# Altium PCB Connector_26P.PcbDoc
Units mm, origin at the board's own origin, x right, y up, seen from the top; angles counter-clockwise.
Board outline 35.43 x 48.13 mm, 2 copper layers (Top Layer, Bottom Layer); 3 components, 26 nets, 84 pads, 0 vias.
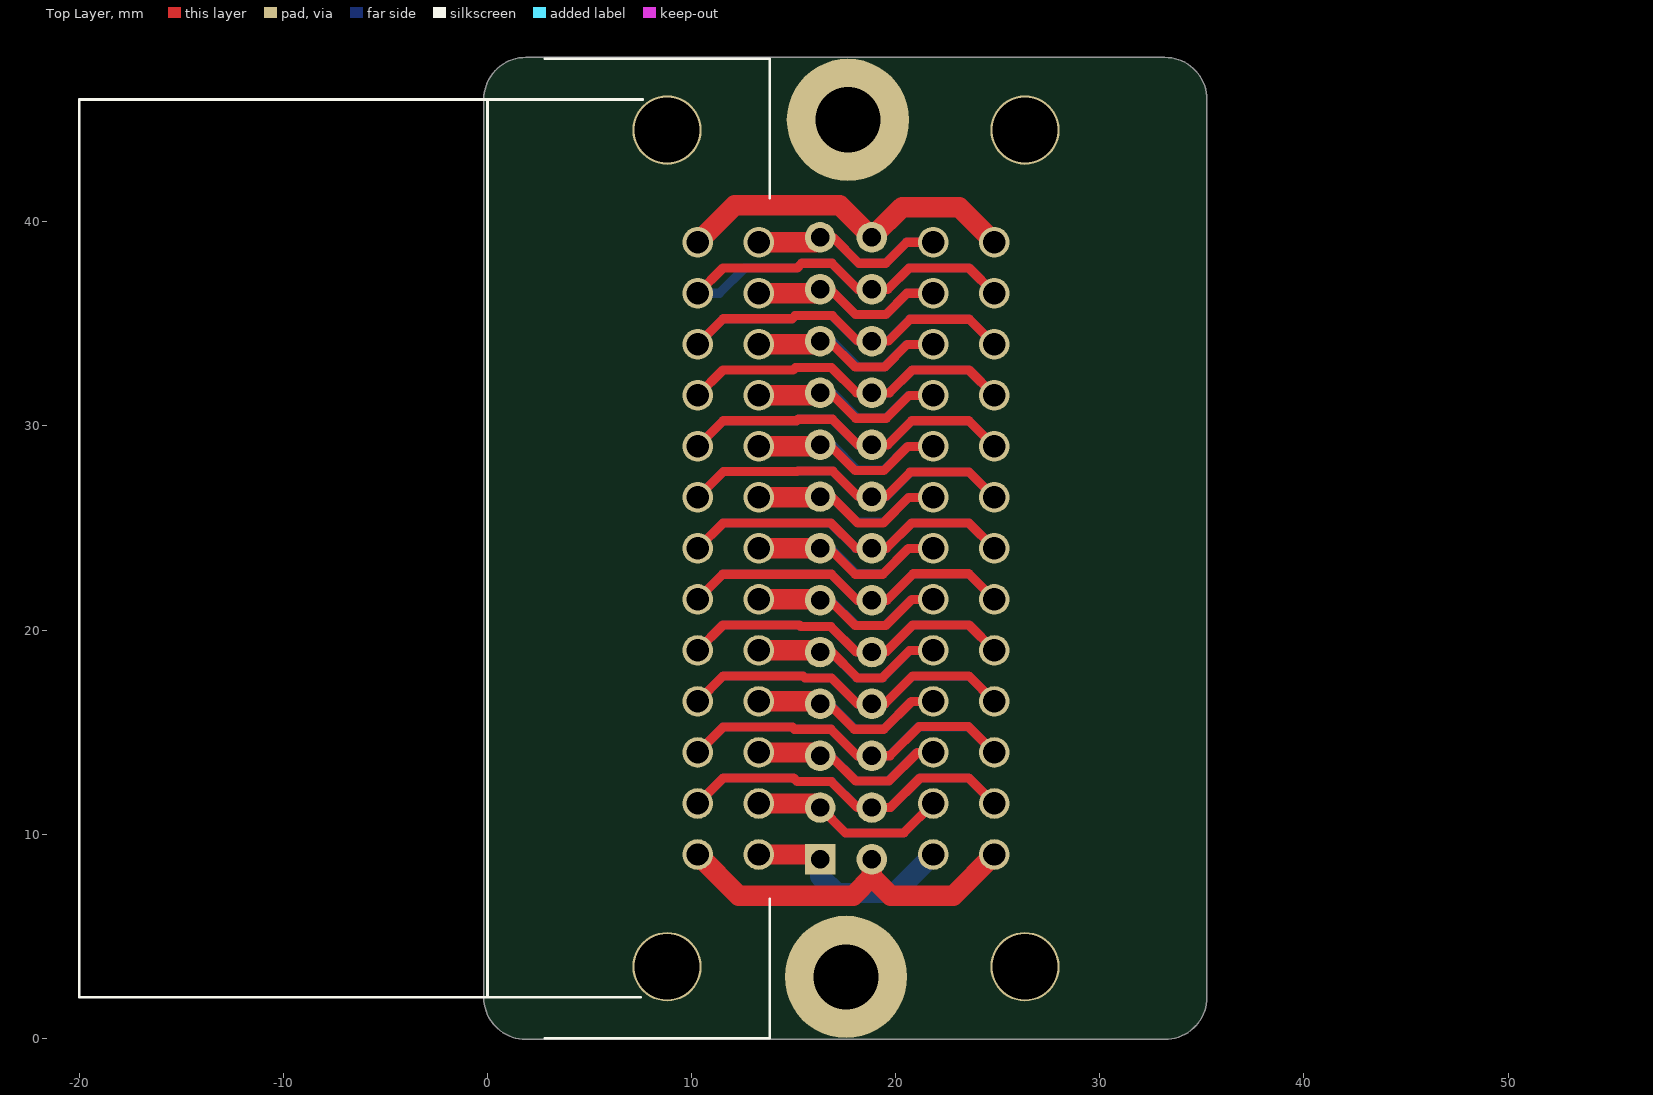
[diagram p0: Top Layer view]
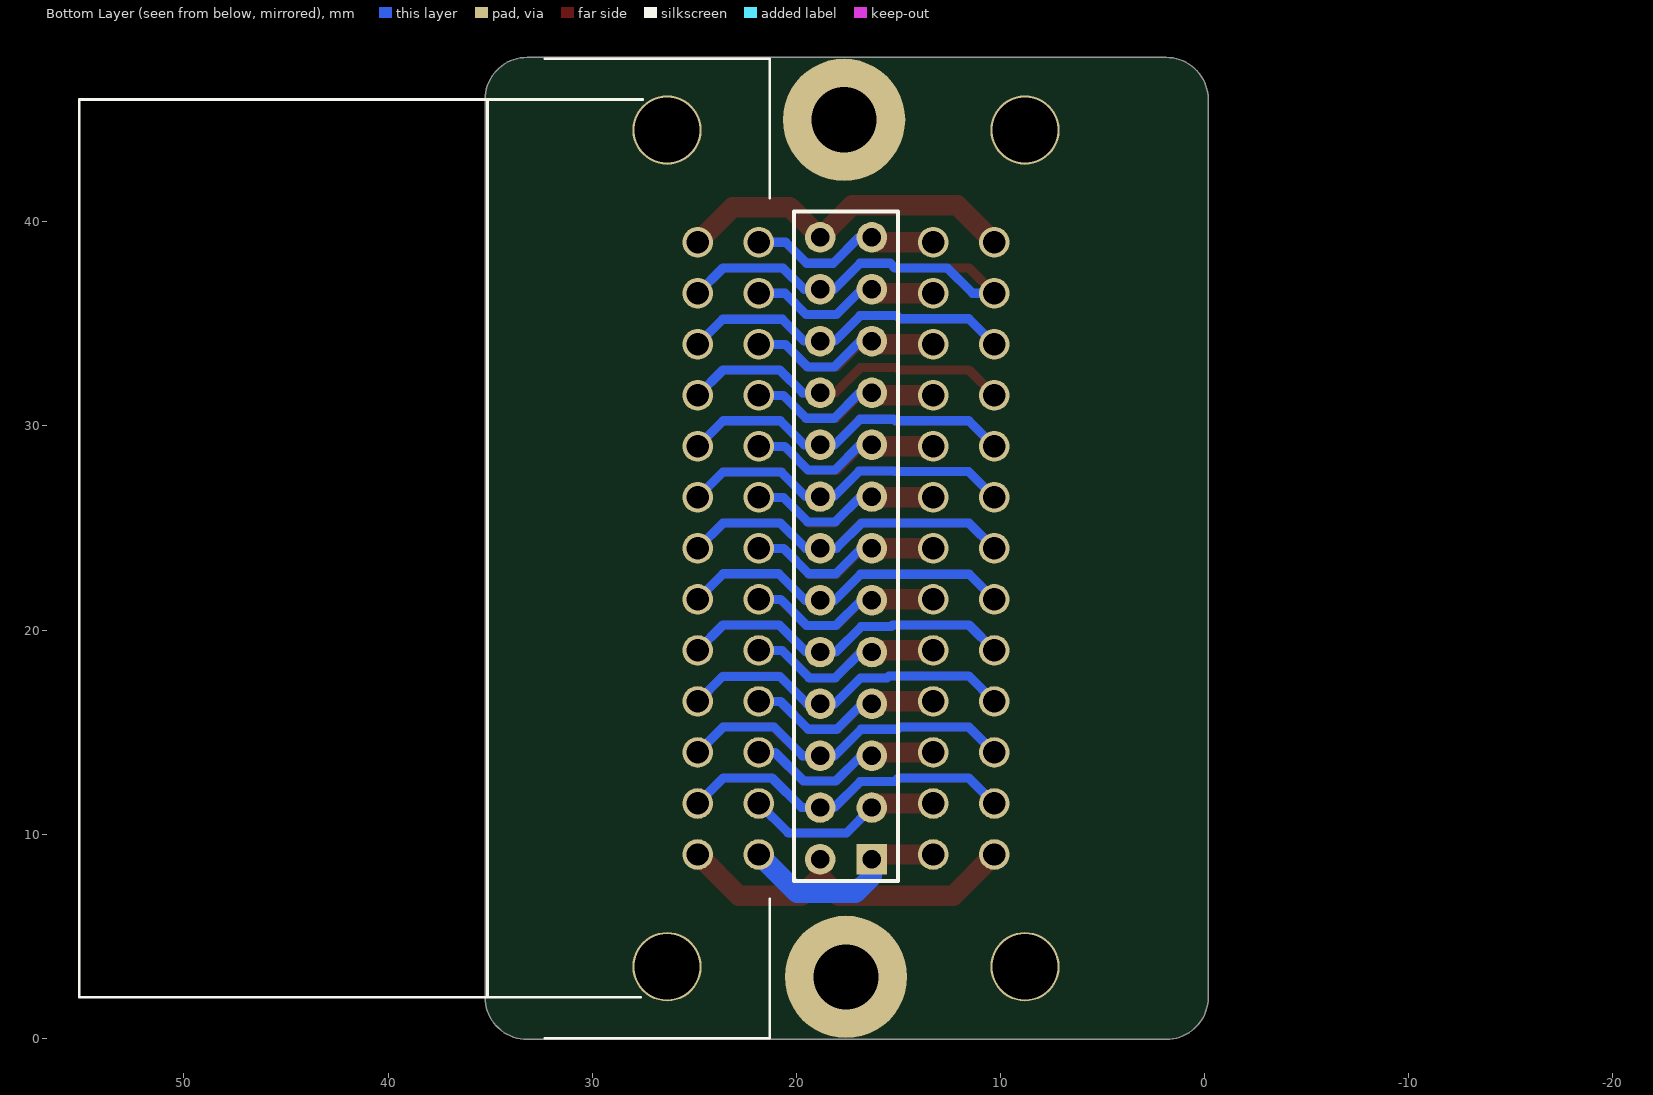
[diagram p1: Bottom Layer view, seen from below]

## Layer stack, top to bottom
Top Solder: solder mask 0.0102, Solder Resist, Dk 3.5
Top Layer: signal copper 0.0356
Dielectric 1: dielectric 0.32, FR-4, Dk 4.8
Bottom Layer: signal copper 0.0356
Bottom Solder: solder mask 0.0102, Solder Resist, Dk 3.5

## Board outline
-0.191,2 -0.191,46 cw(c1.873,46) 1.873,48.064 33.153,48.064 cw(c33.153,48) 33.166,48.063 cw(c33.179,48) 33.179,48.064 cw(c33.179,46) 35.243,46 cw(c35.179,46) 35.242,45.987 cw(c35.179,45.974) 35.243,45.974 35.243,2 cw(c33.179,2) 33.179,-0.064 1.873,-0.064 cw(c1.873,2)

## Design rules (kind name [scope] priority, off if disabled: settings)
Clearance [All] p1: gap=0.254 ignorepadtopadclearanceinfootprint=FALSE except(0: Arc-Hole Track-Hole SMDPad-Hole THPad-Hole Via-Hole Fill-Hole Poly-Hole Region-Hole Text-Hole)
HoleSize [All] p1: absolutevalues=TRUE maxlimit=4 minlimit=0.3 maxpercent=80.000 minpercent=20.000
PolygonConnect [All] p1: connectstyle=Relief reliefconductorwidth=0.254 reliefentries=4 polygonreliefangle="90 Angle" airgapwidth=0.254
RoutingVias [All] p1: holewidth=0.711 width=1.27 viastyle="Through Hole" minholewidth=0.711 minwidth=1.27 maxholewidth=0.711 maxwidth=1.27
SilkToSolderMaskClearance [IsPad] p1: minsilkscreentomaskgap=0 clearancetoexposedcopper=TRUE
SolderMaskExpansion [All] p1: expansion=0.102
Width [All] p1: maxlimit=2 minlimit=0.254 preferedwidth=0.254
28 further rules are at their usual default settings.

## Classes and differential pairs
component class Connector_26P: ""

## Components (designator, comment, footprint, x,y, rotation, side; value= is the part's Value field where it differs from the comment)
P1 "MX23A26NF1" MX23A26NF1 23.327,24 r0 bottom locked
P2 "MX23A26NF1" MX23A26NF1 11.787,24 r180 top locked
P3 "Header 13X2A" HDR2X13_CEN 16.287,8.76 r90 bottom locked

## Footprints (in the part's own frame and the unit in brackets; to place one, negate y for a bottom-side part, rotate by r counter-clockwise, add the part's x,y. Pads: shape width x height; smd on the part's side, far side on the other; paste and mask are expansions set on the pad)
HDR2X13_CEN [mm] "Connector; Header; 13x2 Position"
  rect 1.5x1.5 hole 0.9: 1(0,0)
  round 1.5 hole 0.9: 2(2.54,0) 3(5.08,0) 4(7.62,0) 5(10.16,0) 6(12.7,0) 7(15.24,0) 8(17.78,0) 9(20.32,0) 10(22.86,0) 11(25.4,0) 12(27.94,0) 13(30.48,0) 14(0,2.54) 15(2.54,2.54) 16(5.08,2.54) 17(7.62,2.54) 18(10.16,2.54) 19(12.7,2.54) 20(15.24,2.54) 21(17.78,2.54) 22(20.32,2.54) 23(22.86,2.54) 24(25.4,2.54) 25(27.94,2.54) 26(30.48,2.54)
  silkscreen extent -1.06,-1.27 31.75,3.81
MX23A26NF1 [mm]
  round 3.4 hole 3.2: 0(3,20.5) 0(3,-20.5)
  round 1.5 hole 1.1: 1(-1.5,15) 2(-1.5,12.5) 3(-1.5,10) 4(-1.5,7.5) 5(-1.5,5) 6(-1.5,2.5) 7(-1.5,0) 8(-1.5,-2.5) 9(-1.5,-5) 10(-1.5,-7.5) 11(-1.5,-10) 12(-1.5,-12.5) 13(-1.5,-15) 14(1.5,15) 15(1.5,12.5) 16(1.5,10) 17(1.5,7.5) 18(1.5,5) 19(1.5,2.5) 20(1.5,0) 21(1.5,-2.5) 22(1.5,-5) 23(1.5,-7.5) 24(1.5,-10) 25(1.5,-12.5) 26(1.5,-15)
  silkscreen extent -2.03,-24 31.8,24, body extent -2,-24 36.3,24, height 18.3

## Part data
P1 P2: library part MHDR2X13, "Header, 13-Pin, Dual row", LatestRevisionDate=17-Jul-2002, LatestRevisionNote="Re-released for DXP Platform.", Publisher="Altium Limited"
P3: "Header, 13-Pin, Dual row", LatestRevisionDate=17-Jul-2002, LatestRevisionNote="Re-released for DXP Platform.", Publisher="Altium Limited"

## Free pads (board coordinates)
  round 6 hole 3.2: 0(17.557,3) 0(17.653,45)

## Nets (pads, with @x,y where several pads share a name; then routed paths per layer and width w, separated by ;. In a path a pad name is that pad's centre, name@x,y a point inside that pad or via, vN(x,y) a via of type N, cw(c..) or ccw(c..) an arc to the next point about the centre after c; other vN are vias at no path point)
P1: P1.1 P2.1 P3.1 | length 10.6
  Top Layer w1: P2.1 16.047,9 P3.1
  Bottom Layer w1: P3.1 16.287,7.919 17.094,7.112 19.939,7.112 P1.1
P2: P1.2 P2.2 P3.2 | length 16.4
  Top Layer w0.45: P3.2 17.529,10.058 20.385,10.058 P1.2
  Top Layer w1: P2.2 16.087,11.5 P3.2
  Bottom Layer w0.45: P3.2 17.529,10.058 20.385,10.058 P1.2
P3: P1.3 P2.3 P3.3 | length 16.3
  Top Layer w0.45: P3.3 16.792,13.84 18.034,12.598 19.66,12.598 21.061,14 P1.3
  Top Layer w1: P2.3 16.127,14 P3.3
  Bottom Layer w0.45: P3.3 16.818,13.84 18.059,12.598 19.634,12.598 21.036,14 P1.3
P4: P1.4 P2.4 P3.4 | length 16.3
  Top Layer w0.45: P3.4 16.716,16.38 17.958,15.138 19.406,15.138 20.767,16.5 P1.4
  Top Layer w1: P2.4 16.167,16.5 P3.4
  Bottom Layer w0.45: P3.4 16.767,16.38 18.009,15.138 19.406,15.138 20.767,16.5 P1.4
P5: P1.5 P2.5 P3.5 | length 16.3
  Top Layer w0.45: P3.5 16.843,18.92 18.11,17.653 19.329,17.653 20.676,19 P1.5
  Top Layer w1: P2.5 16.207,19 P3.5
  Bottom Layer w0.45: P3.5 16.818,18.92 18.085,17.653 19.355,17.653 20.702,19 P1.5
P6: P1.6 P2.6 P3.6 | length 16.2
  Top Layer w0.45: P3.6 16.767,21.46 18.009,20.218 19.507,20.218 20.789,21.5 P1.6
  Top Layer w1: P2.6 16.247,21.5 P3.6
  Bottom Layer w0.45: P3.6 16.818,21.46 18.059,20.218 19.482,20.218 20.763,21.5 P1.6
P7: P1.7 P2.7 P3.7 | length 16.2
  Top Layer w0.45: P3.7 16.742,24 18.009,22.733 19.355,22.733 20.622,24 P1.7
  Top Layer w1: P2.7 P3.7
  Bottom Layer w0.45: P3.7 16.818,24 18.059,22.758 19.38,22.758 20.622,24 P1.7
P8: P1.8 P2.8 P3.8 | length 16.2
  Top Layer w0.45: P3.8 16.843,26.54 18.136,25.248 19.38,25.248 20.633,26.5 P1.8
  Top Layer w1: P2.8 16.247,26.5 P3.8
  Bottom Layer w0.45: P3.8 16.843,26.54 18.085,25.298 19.431,25.298 20.633,26.5 P1.8
P9: P1.9 P2.9 P3.9 | length 16.1
  Top Layer w0.45: P3.9 16.742,29.08 18.009,27.813 19.406,27.813 20.593,29 P1.9
  Top Layer w1: P2.9 16.207,29 P3.9
  Bottom Layer w0.45: P3.9 16.869,29.08 18.11,27.838 19.406,27.838 20.567,29 P1.9
P10: P1.10 P2.10 P3.10 | length 16.1
  Top Layer w0.45: P3.10 16.792,31.62 18.034,30.378 19.533,30.378 20.654,31.5 P1.10
  Top Layer w1: P2.10 16.167,31.5 P3.10
  Bottom Layer w0.45: P3.10 16.894,31.62 18.136,30.378 19.507,30.378 20.629,31.5 P1.10
P11: P1.11 P2.11 P3.11 | length 16.1
  Top Layer w0.45: P3.11 16.742,34.16 18.009,32.893 19.456,32.893 20.563,34 P1.11
  Top Layer w1: P2.11 16.127,34 P3.11
  Bottom Layer w0.45: P3.11 16.869,34.16 18.136,32.893 19.431,32.893 20.538,34 P1.11
P12: P1.12 P2.12 P3.12 | length 16.1
  Top Layer w0.45: P3.12 16.792,36.7 18.034,35.458 19.507,35.458 20.549,36.5 P1.12
  Top Layer w1: P2.12 16.087,36.5 P3.12
  Bottom Layer w0.45: P3.12 16.792,36.7 18.034,35.458 19.507,35.458 20.549,36.5 P1.12
P13: P1.13 P2.13 P3.13 | length 16.1
  Top Layer w0.45: P3.13 16.919,39.24 18.186,37.973 19.507,37.973 20.534,39 P1.13
  Top Layer w1: P2.13 16.047,39 P3.13
  Bottom Layer w0.45: P3.13 16.919,39.24 18.186,37.973 19.482,37.973 20.509,39 P1.13
P14: P1.14 P2.14 P3.14 | length 17.8
  Top Layer w1: P2.14 12.302,6.985 17.907,6.985 18.827,7.905 ; P3.14 18.827,7.905 ; P1.14 22.812,6.985 19.747,6.985 18.827,7.905
P15: P1.15 P2.15 P3.15 | length 33.6
  Top Layer w0.45: P2.15 11.538,12.751 14.986,12.751 15.164,12.573 16.84,12.573 18.113,11.3 P3.15 19.733,11.3 21.184,12.751 23.576,12.751 P1.15
  Bottom Layer w0.45: P2.15 11.538,12.751 14.986,12.751 15.164,12.573 16.866,12.573 18.139,11.3 P3.15 19.733,11.3 21.184,12.751 23.576,12.751 P1.15
P16: P1.16 P2.16 P3.16 | length 33.5
  Top Layer w0.45: P2.16 11.527,15.24 14.935,15.24 15.037,15.138 16.815,15.138 18.113,13.84 P3.16 19.707,13.84 21.133,15.265 23.562,15.265 P1.16
  Bottom Layer w0.45: P2.16 11.527,15.24 14.935,15.24 15.037,15.138 16.815,15.138 18.113,13.84 P3.16 19.682,13.84 21.082,15.24 23.587,15.24 P1.16
P17: P1.17 P2.17 P3.17 | length 33.4
  Top Layer w0.45: P2.17 11.542,17.755 15.443,17.755 15.545,17.653 16.84,17.653 18.113,16.38 P3.17 19.453,16.38 20.828,17.755 23.572,17.755 P1.17
  Bottom Layer w0.45: P2.17 11.542,17.755 15.443,17.755 15.545,17.653 16.84,17.653 18.113,16.38 P3.17 19.453,16.38 20.803,17.729 23.598,17.729 P1.17
P18: P1.18 P2.18 P3.18 | length 33.3
  Top Layer w0.45: P2.18 11.531,20.244 15.265,20.244 15.342,20.168 16.815,20.168 18.062,18.92 P3.18 19.504,18.92 20.828,20.244 23.583,20.244 P1.18
  Bottom Layer w0.45: P2.18 11.531,20.244 15.265,20.244 15.342,20.168 16.815,20.168 18.062,18.92 P3.18 19.504,18.92 20.828,20.244 23.583,20.244 P1.18
P19: P1.19 P2.19 P3.19 | length 33.3
  Top Layer w0.45: P2.19 11.52,22.733 16.84,22.733 18.113,21.46 P3.19 19.555,21.46 20.853,22.758 23.569,22.758 P1.19
  Bottom Layer w0.45: P2.19 11.52,22.733 16.84,22.733 18.113,21.46 P3.19 19.555,21.46 20.853,22.758 23.569,22.758 P1.19
P20: P1.20 P2.20 P3.20 | length 33.2
  Top Layer w0.45: P2.20 11.535,25.248 16.815,25.248 18.062,24 P3.20 19.53,24 20.777,25.248 23.579,25.248 P1.20
  Bottom Layer w0.45: P2.20 11.535,25.248 16.789,25.248 18.037,24 P3.20 19.53,24 20.777,25.248 23.579,25.248 P1.20
P21: P1.21 P2.21 P3.21 | length 33.2
  Top Layer w0.45: P2.21 11.549,27.762 15.164,27.762 15.189,27.788 16.916,27.788 18.164,26.54 P3.21 19.504,26.54 20.701,27.737 23.59,27.737 P1.21
  Bottom Layer w0.45: P2.21 11.549,27.762 15.164,27.762 15.189,27.788 16.916,27.788 18.164,26.54 P3.21 19.53,26.54 20.726,27.737 23.59,27.737 P1.21
P22: P1.22 P2.22 P3.22 | length 33.2
  Top Layer w0.45: P2.22 11.538,30.251 15.138,30.251 15.215,30.328 16.891,30.328 18.139,29.08 P3.22 19.606,29.08 20.777,30.251 23.576,30.251 P1.22
  Bottom Layer w0.45: P2.22 11.538,30.251 15.138,30.251 15.215,30.328 16.866,30.328 18.113,29.08 P3.22 19.606,29.08 20.777,30.251 23.576,30.251 P1.22
P23: P1.23 P2.23 P3.23 | length 23.6
  Top Layer w0.45: P2.23 11.528,32.741 14.961,32.741 15.088,32.868 16.84,32.868 18.088,31.62 P3.23 19.682,31.62 20.803,32.741 23.586,32.741 P1.23
  Bottom Layer w0.45: P3.23 19.682,31.62 20.803,32.741 23.586,32.741 P1.23
P24: P1.24 P2.24 P3.24 | length 33.2
  Top Layer w0.45: P2.24 11.542,35.255 14.91,35.255 15.062,35.408 16.891,35.408 18.139,34.16 P3.24 19.631,34.16 20.701,35.23 23.597,35.23 P1.24
  Bottom Layer w0.45: P2.24 11.542,35.255 14.91,35.255 15.062,35.408 16.866,35.408 18.113,34.16 P3.24 19.606,34.16 20.676,35.23 23.597,35.23 P1.24
P25: P1.25 P2.25 P3.25 | length 33.3
  Top Layer w0.45: P2.25 11.531,37.744 15.164,37.744 15.392,37.973 16.866,37.973 18.139,36.7 P3.25 19.606,36.7 20.65,37.744 23.583,37.744 P1.25
  Bottom Layer w0.45: P2.25 11.354,36.5 12.598,37.744 15.164,37.744 15.392,37.973 16.866,37.973 18.139,36.7 P3.25 19.606,36.7 20.65,37.744 23.583,37.744 P1.25
P26: P1.26 P2.26 P3.26 | length 17.3
  Top Layer w1: P2.26 12.105,40.818 17.249,40.818 P3.26 20.303,40.716 23.111,40.716 P1.26
pads on no net: P1.0 P2.0

## Silkscreen, mask and mechanical layers (free items; w line width, h text height)
Mechanical 1:
  lines w0.127: 33.153,48 1.873,48 ccw(c1.873,46) -0.127,46 -0.127,2 ccw(c1.873,2) 1.873,0 33.179,0 ccw(c33.179,2) 35.179,2 35.179,45.974 ; 33.179,48 cw(c33.179,46) 35.179,46